# Altium PCB WMCB-V2.PcbDoc
Units mm, origin at the board's own origin, x right, y up, seen from the top; angles counter-clockwise.
Board outline 35 x 45 mm, 2 copper layers (TopLayer, BottomLayer); 31 components, 44 nets, 148 pads, 142 vias.
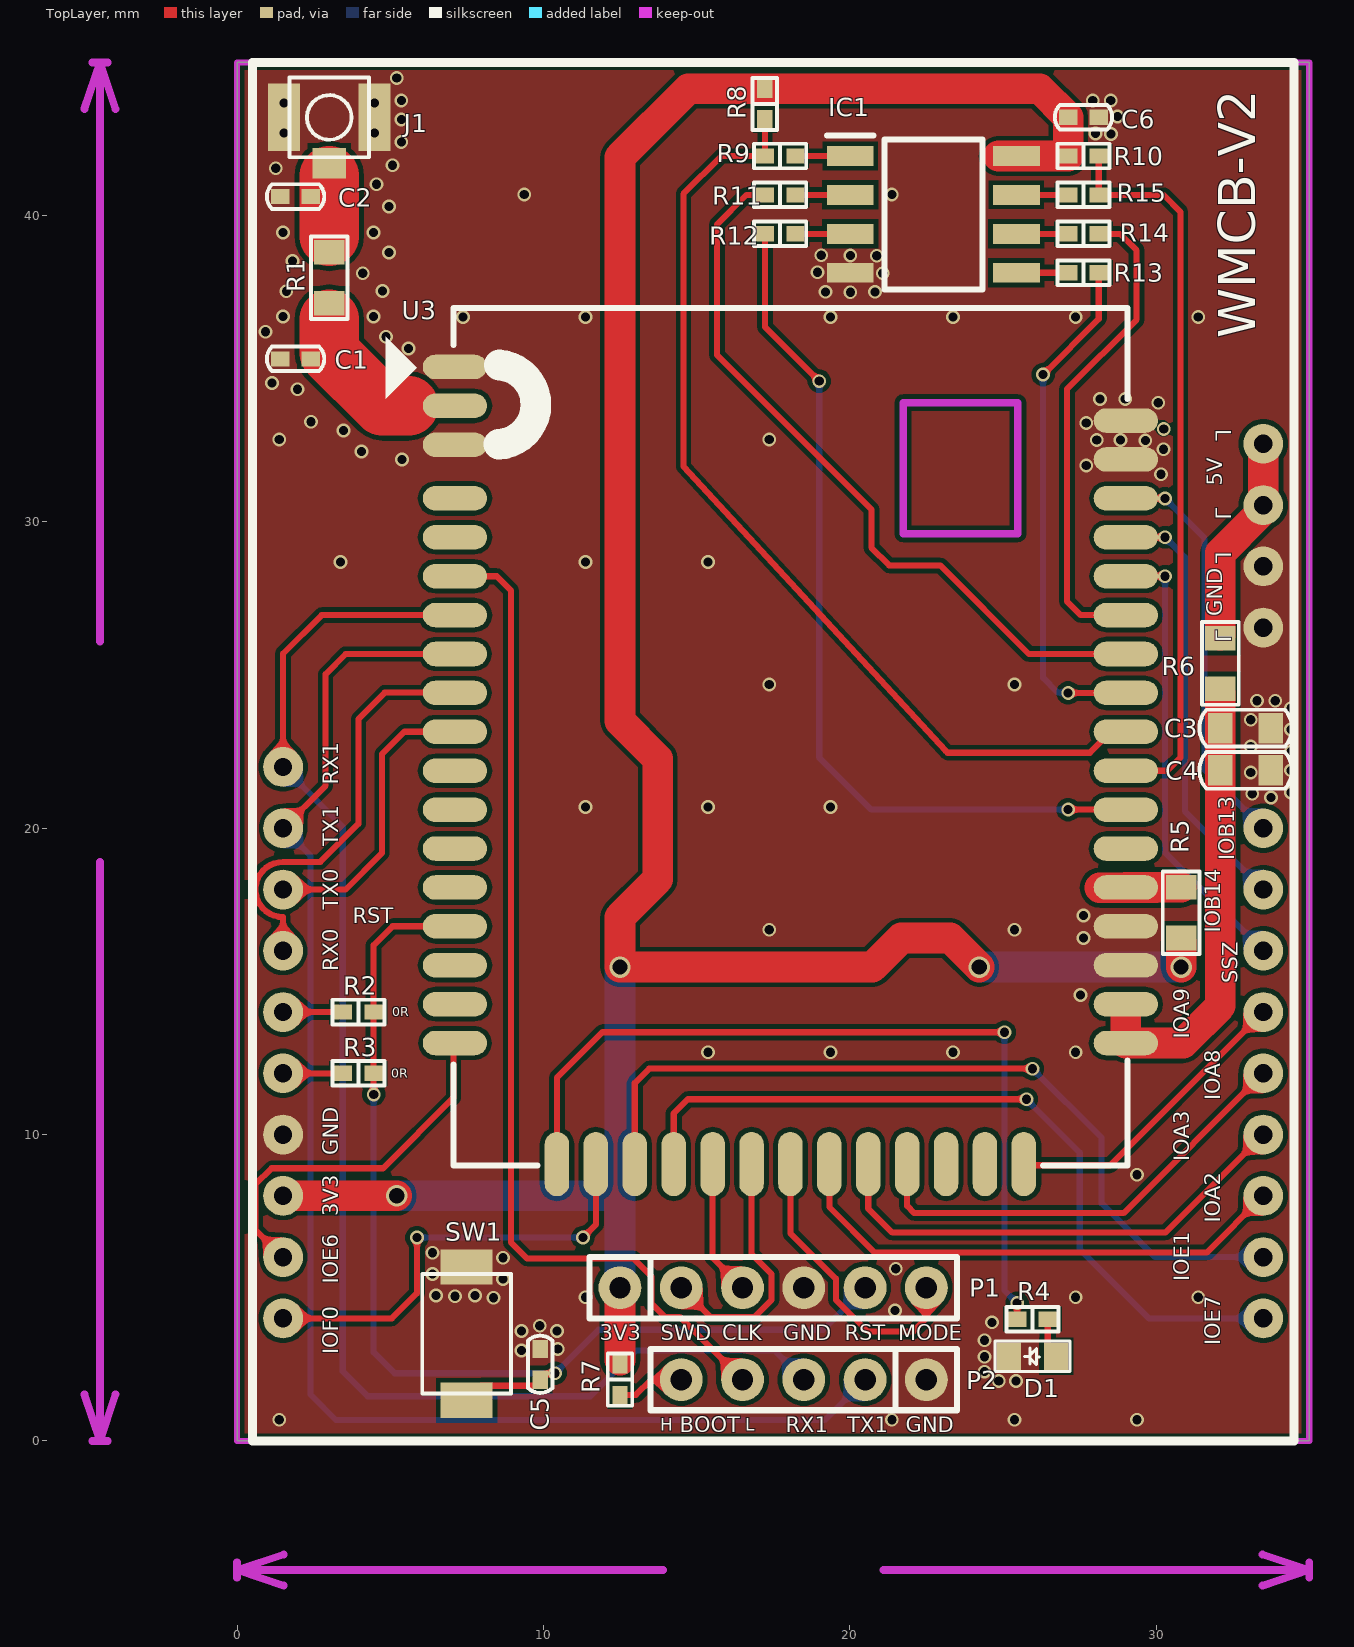
[diagram p0: TopLayer view]
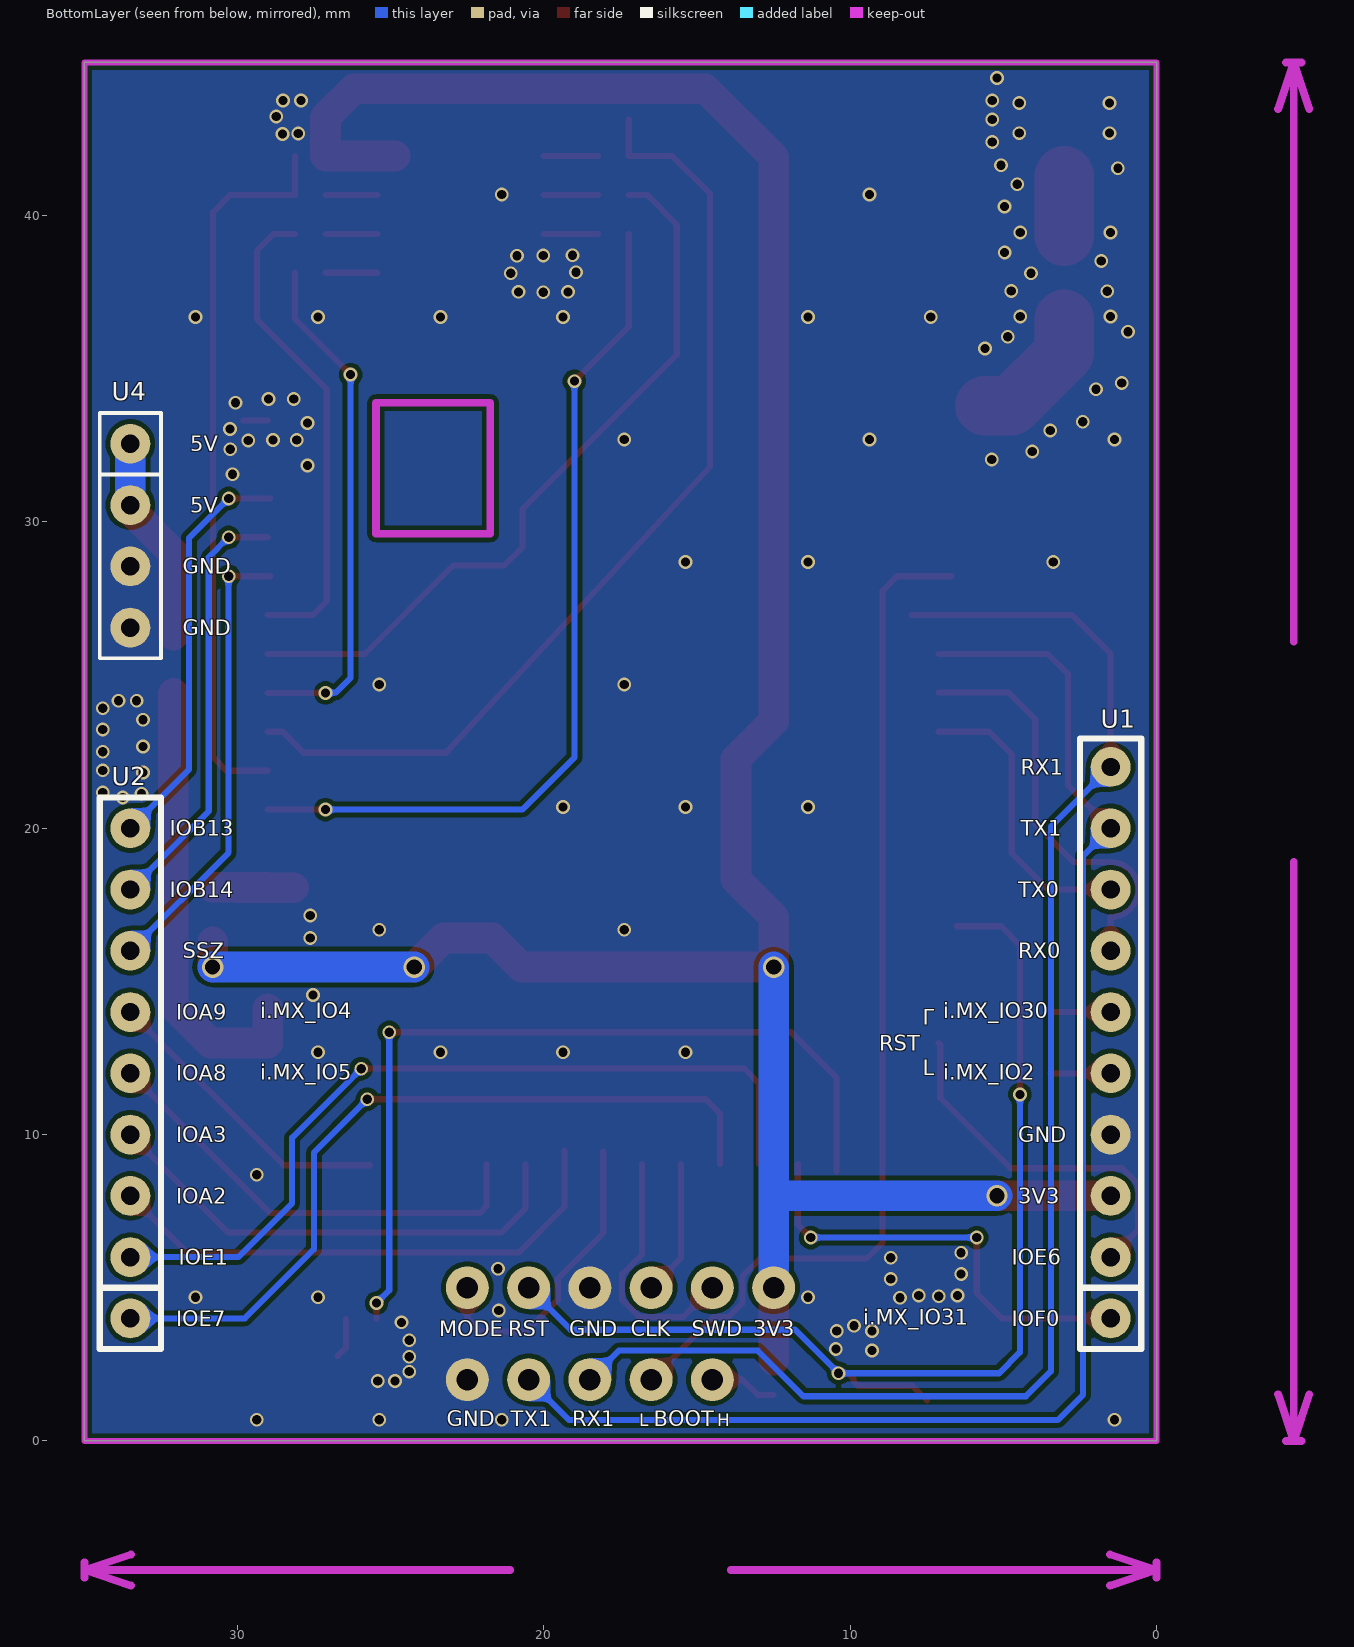
[diagram p1: BottomLayer view, seen from below]
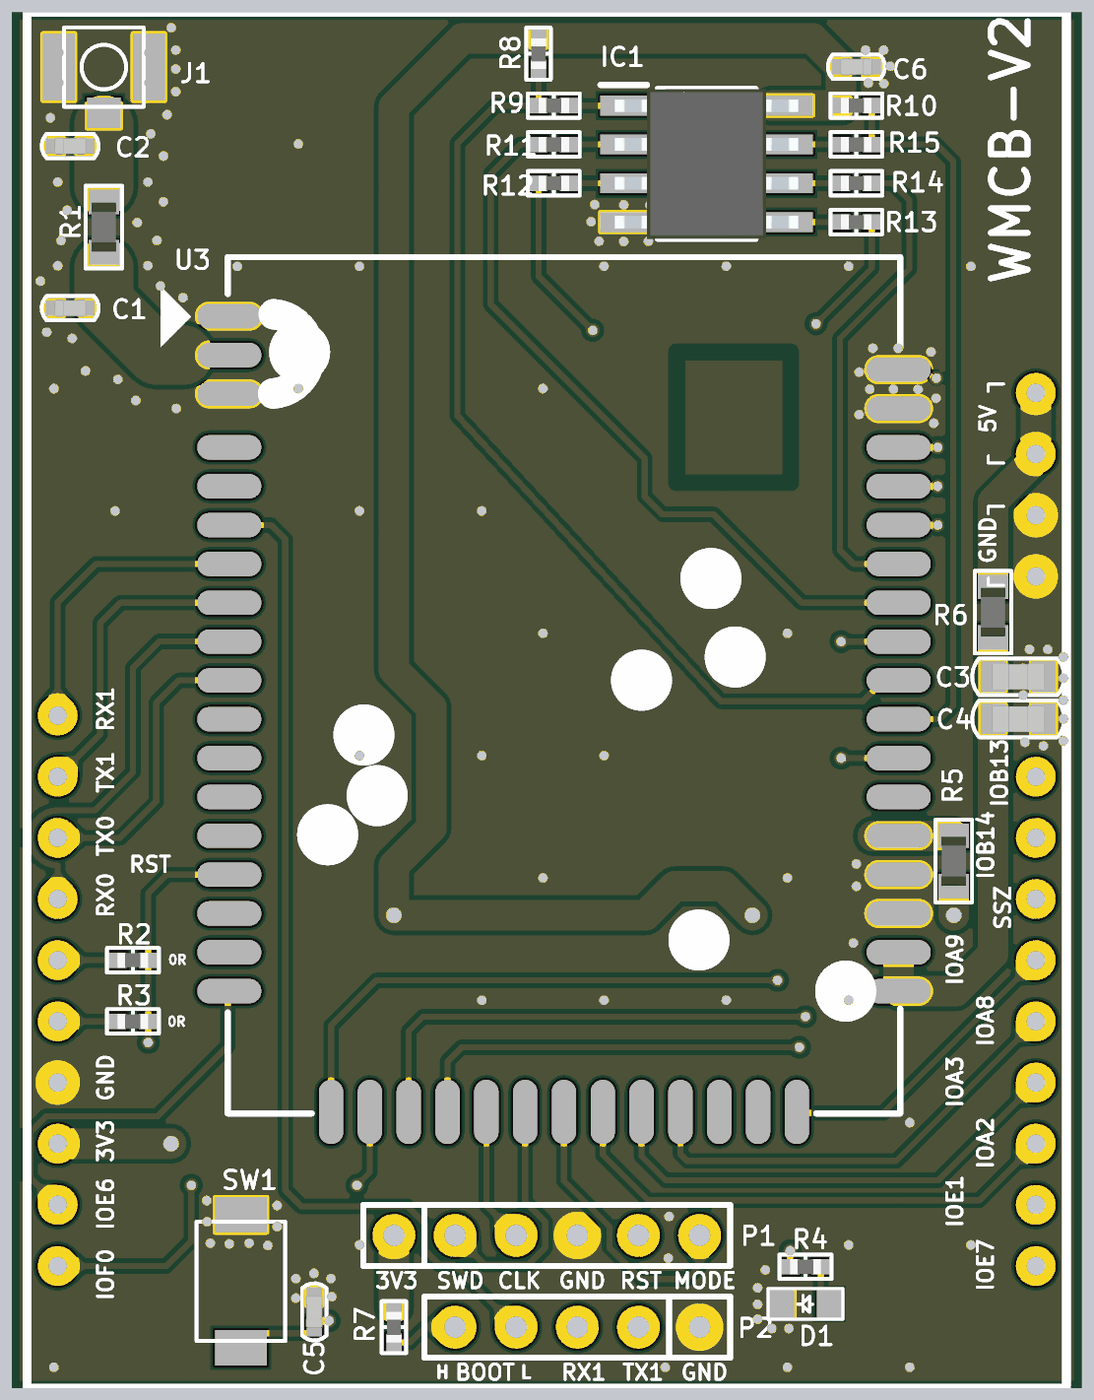
[diagram p2: 3D render of the assembled board from above, using the file's embedded part models]

## Layer stack, top to bottom
TopSolder: solder mask 0.0102, Solder Resist, Dk 3.5
TopLayer: signal copper 0.0711
Dielectric2: prepreg 0.32, FR-4, Dk 4.8
BottomLayer: signal copper 0.0711
BottomSolder: solder mask 0.0102, Solder Resist, Dk 3.5

## Board outline
0,0 0,45 35,45 35,0

## Design rules (kind name [scope] priority, off if disabled: settings)
Clearance [All] p1: gap=0.15 ignorepadtopadclearanceinfootprint=FALSE except(0: Arc-Hole Track-Hole SMDPad-Hole THPad-Hole Via-Hole Fill-Hole Poly-Hole Region-Hole Text-Hole)
ComponentClearance [All] p1 off: gap=0.254 collisioncheckmode=3 verticalgap=0.254 showdistances=FALSE
DiffPairsRouting DiffPairsRouting_9 [All] p1: maxlimit=0.254 minlimit=0.191 mostfreqgap=0.254 toplayer_minwidth=0.381 toplayer_maxwidth=0.381 toplayer_prefwidth=0.381 bottomlayer_minwidth=0.381 bottomlayer_maxwidth=0.381 bottomlayer_prefwidth=0.381 maxuncoupledlength=12.7
DiffPairsRouting DiffPairsRouting_8 [InDifferentialPair('NewDifferentialPair9')] p2: maxlimit=0.203 minlimit=0.203 mostfreqgap=0.203 toplayer_minwidth=0.381 toplayer_maxwidth=0.381 toplayer_prefwidth=0.381 bottomlayer_minwidth=0.381 bottomlayer_maxwidth=0.381 bottomlayer_prefwidth=0.381 maxuncoupledlength=12.7
DiffPairsRouting DiffPairsRouting_7 [InDifferentialPair('NewDifferentialPair8')] p3: maxlimit=0.203 minlimit=0.203 mostfreqgap=0.203 toplayer_minwidth=0.381 toplayer_maxwidth=0.381 toplayer_prefwidth=0.381 bottomlayer_minwidth=0.381 bottomlayer_maxwidth=0.381 bottomlayer_prefwidth=0.381 maxuncoupledlength=12.7
DiffPairsRouting DiffPairsRouting_6 [InDifferentialPair('NewDifferentialPair7')] p4: maxlimit=0.203 minlimit=0.203 mostfreqgap=0.203 toplayer_minwidth=0.381 toplayer_maxwidth=0.381 toplayer_prefwidth=0.381 bottomlayer_minwidth=0.381 bottomlayer_maxwidth=0.381 bottomlayer_prefwidth=0.381 maxuncoupledlength=12.7
DiffPairsRouting DiffPairsRouting_5 [InDifferentialPair('NewDifferentialPair6')] p5: maxlimit=0.203 minlimit=0.203 mostfreqgap=0.203 toplayer_minwidth=0.381 toplayer_maxwidth=0.381 toplayer_prefwidth=0.381 bottomlayer_minwidth=0.381 bottomlayer_maxwidth=0.381 bottomlayer_prefwidth=0.381 maxuncoupledlength=12.7
DiffPairsRouting DiffPairsRouting_4 [InDifferentialPair('NewDifferentialPair5')] p6: maxlimit=0.203 minlimit=0.203 mostfreqgap=0.203 toplayer_minwidth=0.381 toplayer_maxwidth=0.381 toplayer_prefwidth=0.381 bottomlayer_minwidth=0.381 bottomlayer_maxwidth=0.381 bottomlayer_prefwidth=0.381 maxuncoupledlength=12.7
DiffPairsRouting DiffPairsRouting_3 [InDifferentialPair('NewDifferentialPair4')] p7: maxlimit=0.203 minlimit=0.203 mostfreqgap=0.203 toplayer_minwidth=0.381 toplayer_maxwidth=0.381 toplayer_prefwidth=0.381 bottomlayer_minwidth=0.381 bottomlayer_maxwidth=0.381 bottomlayer_prefwidth=0.381 maxuncoupledlength=12.7
DiffPairsRouting DiffPairsRouting_2 [InDifferentialPair('NewDifferentialPair3')] p8: maxlimit=0.203 minlimit=0.203 mostfreqgap=0.203 toplayer_minwidth=0.381 toplayer_maxwidth=0.381 toplayer_prefwidth=0.381 bottomlayer_minwidth=0.381 bottomlayer_maxwidth=0.381 bottomlayer_prefwidth=0.381 maxuncoupledlength=12.7
DiffPairsRouting DiffPairsRouting_1 [InDifferentialPair('NewDifferentialPair2')] p9: maxlimit=0.203 minlimit=0.203 mostfreqgap=0.203 toplayer_minwidth=0.381 toplayer_maxwidth=0.381 toplayer_prefwidth=0.381 bottomlayer_minwidth=0.381 bottomlayer_maxwidth=0.381 bottomlayer_prefwidth=0.381 maxuncoupledlength=12.7
DiffPairsRouting [InDifferentialPair('NewDifferentialPair1')] p10: maxlimit=0.203 minlimit=0.203 mostfreqgap=0.203 toplayer_minwidth=0.381 toplayer_maxwidth=0.381 toplayer_prefwidth=0.381 bottomlayer_minwidth=0.381 bottomlayer_maxwidth=0.381 bottomlayer_prefwidth=0.381 maxuncoupledlength=12.7
FabricationTestPointUsage TestPointUsage [All] p1: valid=0 allowmultiple=FALSE
FabricationTestpoint Testpoint [(IsPad And (OnTopLayer Or OnBottomLayer))] p1: side=3 testpointundercomponent=TRUE minsize=1.016 maxsize=2.54 preferedsize=1.524 minholesize=0.508 maxholesize=1.016 preferedholesize=0.813 testpointgrid=0.025 allowsidetop=TRUE allowsidebottom=TRUE usegrid=TRUE gridtolerance=0
HoleSize [All] p1: absolutevalues=TRUE maxlimit=5 minlimit=0.025 maxpercent=80.000 minpercent=20.000
HoleToHoleClearance [All] p1 off: gap=0.254 allowstackedmicrovias=TRUE
MinimumSolderMaskSliver [All] p1 off: minsoldermaskwidth=0.254
PolygonConnect [All] p1: connectstyle=Direct reliefconductorwidth=0.6 reliefentries=4 polygonreliefangle="90 Angle" airgapwidth=0.254
RoutingVias [All] p1: holewidth=0.3 width=0.5 viastyle="Through Hole" minholewidth=0.3 minwidth=0.453 maxholewidth=5 maxwidth=5
SilkToSilkClearance [All] p1 off: silktosilkclearance=0.254
SilkToSolderMaskClearance SilkscreenOverComponentPads [IsPad] p1 off: minsilkscreentomaskgap=0.254 clearancetoexposedcopper=TRUE
SolderMaskExpansion [All] p1: expansion=0.077 istentingtop=FALSE
Width [All] p1: maxlimit=5 minlimit=0.15 preferedwidth=0.203
21 further rules are at their usual default settings.

## Components (designator, comment, footprint, x,y, rotation, side; value= is the part's Value field where it differs from the comment)
C1 "0.1uF/NC" 0402C 1.91,35.321 r0 top
C2 "0.1uF/NC" 0402C 1.91,40.621 r0 top
C3 "0.1uF" 0603C 32.925,23.269 r180 top
C4 "0.1uF" 0603C 32.925,21.89 r0 top value=1uF
C5 "0.1uF" 0402C 9.895,2.5 r90 top
C6 "1uF" 0402C 27.63,43.214 r180 top
D1 "Green_LED" LED0603--0.4mm 25.965,2.762 r180 top
IC1 "IS62WVS2568FBLL-20NLI" SOIC127P600X175-8N 22.73,40.039 r0 top
J1 "I-PEX-CON" I-PEX-CON 3.01,41.703 r270 top
P1 "6PIN-200" 6PIN-200 12.5,5 r0 top
P2 "5Pin-200" 5pin-200 22.5,2 r180 top
R1 "0R" 0603 3.01,37.971 r90 top
R2 "0R" 0402 3.96,14 r0 top
R3 "0R" 0402 3.96,12 r0 top
R4 "220R" 0402 25.965,3.977 r180 top
R5 "0R" 0603 30.816,17.243 r90 top
R6 "0R" 0603 32.1,25.38 r270 top
R7 "1K" 0402 12.5,2 r270 top
R8 "NC" 0402 17.23,43.641 r270 top
R9 "10k" 0402 17.73,41.944 r0 top
R10 "10k" 0402 27.63,41.944 r180 top
R11 "22R" 0402 17.73,40.674 r180 top
R12 "22R" 0402 17.73,39.404 r0 top
R13 "22R" 0402 27.63,38.134 r180 top
R14 "22R" 0402 27.63,39.404 r180 top
R15 "22R" 0402 27.63,40.674 r180 top
SW1 "Push  Button" Button_2pin-3*4*2MM 7.495,3.5 r270 top value=Switch-SMD-6x6mm
U1 "10PIN-200" 10PIN-200 1.5,4 r90 bottom
U2 "9PIN-200" 9PIN-200 33.5,4 r90 bottom
U3 "WS7300-915" WiSun-Lierda 18.064,23.914 r0 top
U4 "4PIN-200" 4PIN-200 33.5,32.55 r270 bottom value=MicroUSB

## Footprints (in the part's own frame and the unit in brackets; to place one, negate y for a bottom-side part, rotate by r counter-clockwise, add the part's x,y. Pads: shape width x height; smd on the part's side, far side on the other; paste and mask are expansions set on the pad)
4PIN-200 [mm]
  round 1.3 hole 0.6: 1(0,0) 2(2,0) 3(4,0) 4(6,0)
  silkscreen extent -1,-1 7,1
5pin-200 [mm]
  round 1.4 hole 0.7: 1(0,0) 2(2,0) 3(4,0) 4(6,0) 5(8,0)
  silkscreen extent -1,-1 9,1
6PIN-200 [mm]
  round 1.4 hole 0.7: 1(0,0) 2(2,0) 3(4,0) 4(6,0) 5(8,0) 6(10,0)
  silkscreen extent -1,-1 11,1
9PIN-200 [mm]
  round 1.3 hole 0.6: 1(0,0) 2(2,0) 3(4,0) 4(6,0) 5(8,0) 6(10,0) 7(12,0) 8(14,0) 9(16,0)
  silkscreen extent -1,-1 17,1
10PIN-200 [mm]
  round 1.3 hole 0.6: 1(0,0) 2(2,0) 3(4,0) 4(6,0) 5(8,0) 6(10,0) 7(12,0) 8(14,0) 9(16,0) 10(18,0)
  silkscreen extent -1,-1 18.92,1
0402 [mm]
  rect 0.6x0.5 smd: 1(-0.5,0) 2(0.5,0)
  silkscreen extent -0.85,-0.4 0.85,0.4, body extent -0.5,-0.25 0.5,0.25, height 0.25
0402C [mm]
  rect 0.6x0.5 smd: 1(-0.5,0) 2(0.5,0)
  silkscreen extent -0.94,-0.4 0.94,0.4, body extent -0.53,-0.27 0.52,0.28, height 0.58
0603 [mm]
  rect 0.8x1 smd: 1(-0.826,0) 2(0.826,0)
  silkscreen extent -1.35,-0.6 1.35,0.6, body extent -0.8,-0.4 0.8,0.4, height 0.45
0603C [mm]
  rect 0.8x1 smd: 1(-0.826,0) 2(0.826,0)
  silkscreen extent -1.51,-0.6 1.51,0.6, body extent -0.85,-0.44 0.85,0.44, height 0.9
Button_2pin-3*4*2MM [mm] "Button_2pin-3*4*2MM"
  rect 1.15x1.7 smd: 1(2.175,0) 2(-2.175,0)
  silkscreen extent -1.95,-1.45 1.95,1.45
I-PEX-CON [mm]
  rect 1x1.1 smd: 1(0,0)
  rect 2.2x1.05 smd: 2(-1.5,1.475) 2(-1.5,-1.475)
  silkscreen extent -2.8,-1.3 -0.2,1.3
LED0603--0.4mm [mm] "LED0603--0.4mm"
  rect 0.8x0.9 smd: 1(-0.775,0) 2(0.775,0)
  silkscreen extent -1.23,-0.5 1.23,0.5
SOIC127P600X175-8N [mm]
  rect 1.525x0.65 smd: 1(-2.712,1.905) 2(-2.712,0.635) 3(-2.712,-0.635) 4(-2.712,-1.905) 5(2.712,-1.905) 6(2.712,-0.635) 7(2.712,0.635) 8(2.712,1.905)
  silkscreen extent -3.47,-2.45 1.6,2.58, body extent -3,-2.45 3,2.45, height 1.75
WiSun-Lierda [mm]
  oval 2.1x0.8 smd: 1(-10.95,11.144) 2(-10.95,9.874) 3(-10.95,8.604) 4(-10.95,6.854) 5(-10.95,5.584) 6(-10.95,4.314) 7(-10.95,3.044) 8(-10.95,1.774) 9(-10.95,0.504) 10(-10.95,-0.766) 11(-10.95,-2.036) 12(-10.95,-3.306) 13(-10.95,-4.576) 14(-10.95,-5.846) 15(-10.95,-7.116) 16(-10.95,-8.386) 17(-10.95,-9.656) 18(-10.95,-10.926) 32(10.95,-10.926) 33(10.95,-9.656) 34(10.95,-8.386) 35(10.95,-7.116) 36(10.95,-5.846) 37(10.95,-4.576) 38(10.95,-3.306) 39(10.95,-2.036) 40(10.95,-0.766) 41(10.95,0.504) 42(10.95,1.774) 43(10.95,3.044) 44(10.95,4.314) 45(10.95,5.584) 46(10.95,6.854) 47(10.95,8.124) 48(10.95,9.394)
  round 2 on Top Overlay paste-10: 1(-8.65,9.974) 1(-7.732,-5.812) 1(-6.546,-2.55) 1(-6.112,-4.534) 1(2.536,-0.759) 1(4.416,-9.254) 1(4.807,2.566) 1(5.602,0) 1(9.216,-10.926)
  oval 0.8x2.1 smd: 19(-7.62,-14.876) 20(-6.35,-14.876) 21(-5.08,-14.876) 22(-3.81,-14.876) 23(-2.54,-14.876) 24(-1.27,-14.876) 25(0,-14.876) 26(1.27,-14.876) 27(2.54,-14.876) 28(3.81,-14.876) 29(5.08,-14.876) 30(6.35,-14.876) 31(7.62,-14.876)
  KeepOutLayer lines w0.25: 3.683,5.697 7.417,5.697 7.417,9.974 3.683,9.974 3.683,5.697
  silkscreen extent -13.2,-14.93 11,13.07, body extent -11,-14.93 11,13.07, height 3

## Part data
C1 C2 C6: library part CAP, "Capacitor"
C3 C4 C5: library part "Cap Semi", "Capacitor (Semiconductor SIM Model)", LatestRevisionDate=17-Jul-2002, LatestRevisionNote="Re-released for DXP Platform.", PackageReference=C1206, Published=8-Jun-2000, Publisher="Altium Limited"
D1: library part LED, Manufacturer=Citizen, Manufacturer's Part Number=CL-170G-CD-T, Old Part Number=4317000, Package Height=1.1mm, Part Number=41100017000, VALUE_ALLEGRO=Red_LED, Bottom=20, Cost=0.48, FPLIST=mot/0805LED,dig/0805led, PCB_dir=90.000000, PCB_x=46.095000, PCB_y=6.420000, Right=40
IC1: "Integrated Circuit", Manufacturer_Name="Integrated Silicon Solution Inc.", Mouser2 Part Number=870-WVS2568FBLL20NLI, Datasheet Link=https://componentsearchengine.com//IS62WVS2568FBLL-20NLI.pdf, Height=1.75mm, Manufacturer_Part_Number=IS62WVS2568FBLL-20NLI, Mouser2 Price/Stock=https://www.mouser.com/Search/Refine.aspx?Keyword=870-WVS2568FBLL20NLI
J1: library part CON2, "Connector"
P1: "Pin Header", LatestRevisionDate=17-Jul-2002, LatestRevisionNote="Re-released for DXP Platform.", Publisher="Altium Limited"
P2: library part PIN5
R1 R2 R3 R4 R5 R6 R7 R8 R9 R10 R11 R12 R13 R14 R15: library part "Res Semi", "Semiconductor Resistor", LatestRevisionDate=17-Jul-2002, LatestRevisionNote="Re-released for DXP Platform.", PackageReference=AXIAL-0.5, Published=8-Jun-2000, Publisher="Altium Limited"
SW1: library part SW1, "Push Button"
U4: library part CON4, "Connector"

## Via types
v1: diameter 0.45, hole 0.3, TopLayer to BottomLayer, tented both sides, 138 vias
v2: diameter 0.7, hole 0.5, TopLayer to BottomLayer, tented both sides, 4 vias

## Nets (pads, with @x,y where several pads share a name; then routed paths per layer and width w, separated by ;. In a path a pad name is that pad's centre, name@x,y a point inside that pad or via, vN(x,y) a via of type N, cw(c..) or ccw(c..) an arc to the next point about the centre after c; other vN are vias at no path point)
3V3: C6.2 IC1.8 P1.1 R5.1 R7.1 R8.1 R10.2 U1.3 | length 90.7
  TopLayer w1: U1.3 v2(5.21,8) ; R7.1@12.5,2.63 P1.1 ; v2(24.229,15.469) 23.28,16.417 21.687,16.417 20.738,15.469 v2(12.5,15.469) 12.5,17.1 13.73,18.33 13.73,22.27 12.5,23.5 12.5,41.909 14.732,44.141 R8.1 26.203,44.141 C6.2 R10.2 IC1.8 IC1.8@24.856,41.944 ; v2(30.816,15.469) R5.1@30.816,16.3
  BottomLayer w1: v2(5.21,8) 12.5,8 ; P1.1 12.5,8 ; v2(12.5,15.469) 12.5,8 ; v2(24.229,15.469) v2(30.816,15.469)
3V3_OUT: R5.2 U3.36 | length 3.6
  TopLayer w1: U3.36@28.167,18.061 U3.36@29.99,18.061 ; U3.36 R5.2
+5V: R6.1 U4.1 U4.2 | length 8.6
  TopLayer w1: R6.1@32.1,26.3 32.1,28.988 33.35,30.238 33.35,30.319 33.443,30.411 U4.2@33.443,30.55 ; U4.2 33.5,31.48 ; 33.5,31.62 U4.1
  BottomLayer w1: U4.1@33.46,32.55 U4.1 33.5,31.58 ; U4.2 33.5,31.48
CLK: R14.1 U3.43 | length 16
  TopLayer w0.2: R14.1 28.822,39.404 29.363,38.863 29.363,36.603 27.09,34.33 27.09,27.41 27.542,26.958 U3.43
GND: C1.1 C2.1 C3.1 C4.2 C5.2 C6.1 D1.2 IC1.4 J1.2 P1.4 P2.1 SW1.2 U1.4 U3.1@7.114,35.058 U3.3 U3.34 U3.35 U3.47 U3.48 U4.3 U4.4 | length 1
  TopLayer w0.203: U3.48 U3.48@29.825,33.308 ; v1@30.203,33.077 v1(30.25,33.03)
  BottomLayer w0.2: U1.4@1.5,9.87 U1.4
  other v1: 1.375,0.69 21.375,0.69 25.375,0.69 29.375,0.69 24.862,1.955 25.425,1.955 24.398,2.262 24.398,2.747 9.29,2.95 10.47,3 24.398,3.285 9.29,3.59 10.44,3.59 9.88,3.76 24.648,3.871 21.477,4.255 8.374,4.672 11.375,4.69 27.375,4.69 31.375,4.69 7.114,4.724 6.495,4.745 7.764,4.745 8.68,5.29 6.38,5.45 21.5,5.621 8.68,5.98 6.38,6.14 29.375,8.69 15.375,12.69 19.375,12.69 23.375,12.69 27.375,12.69 27.534,14.56 27.63,16.417 17.375,16.69 25.375,16.69 27.63,17.15 11.375,20.69 15.375,20.69 19.375,20.69 33.751,21.005 33.141,21.126 34.4,21.169 33.091,21.822 34.4,21.89 34.4,22.5 33.091,22.669 34.4,23.22 33.091,23.545 34.4,23.914 33.295,24.164 33.891,24.164 17.375,24.69 25.375,24.69 3.375,28.69 11.375,28.69 15.375,28.69 30.163,31.557 27.72,31.84 5.38,32.038 4.059,32.3 30.238,32.373 28.066,32.67 28.84,32.67 29.65,32.66 1.375,32.69 9.375,32.69 17.375,32.69 3.47,32.988 27.72,33.23 2.41,33.27 30.07,33.89 28.167,34.008 28.995,34.008 1.977,34.33 1.14,34.533 5.597,35.662 4.859,36.046 0.931,36.206 7.375,36.69 11.375,36.69 19.375,36.69 23.375,36.69 27.375,36.69 31.375,36.69 1.5,36.709 4.452,36.709 20.02,37.5 19.21,37.51 20.826,37.51 1.609,37.531 4.745,37.536 4.103,38.12 21.08,38.12 18.95,38.15 1.809,38.52 20.879,38.692 19.071,38.707 20.02,38.7 4.96,38.797 1.5,39.446 4.452,39.446 4.963,40.295 9.375,40.69 21.375,40.69 4.547,41.021 1.265,41.544 5.077,41.646 5.363,42.398 28.53,42.66 28.02,42.68 1.535,42.691 4.485,42.691 5.363,43.14 28.74,43.23 1.535,43.677 4.485,43.677 5.363,43.76 27.93,43.76 28.52,43.76 5.214,44.491
HOLD: R10.1 R15.1 U3.39 | length 23.9
  TopLayer w0.2: R10.1 R15.1 30.242,40.674 30.8,40.116 30.8,22.315 30.364,21.878 U3.39
I.MX_IO2: R3.1 U1.5 | length 2
  TopLayer w0.2: U1.5 R3.1
I.MX_IO4: U2.6 U3.31 | length 9.9
  TopLayer w0.2: U3.31@25.684,9 28.5,9 U2.6
i.MX_IO5: U2.5 U3.28 | length 15
  TopLayer w0.2: U3.28 21.87,9.035 21.87,7.67 22.1,7.44 28.94,7.44 U2.5
i.MX_IO30: R2.1 U1.6 | length 2
  TopLayer w0.2: U1.6 R2.1
i.MX_IO31: U1.1 U3.20 | length 14.5
  TopLayer w0.2: U1.1 5.05,4 5.872,4.822 v1(5.872,6.64) ; v1(11.29,6.64) 11.714,7.064 U3.20
  BottomLayer w0.2: v1(5.872,6.64) v1@11.25,6.64
IOA2: U2.3 U3.26 | length 17.4
  TopLayer w0.2: U3.26@19.334,9.474 19.334,7.636 20.82,6.15 31.65,6.15 U2.3
IOA3: U2.4 U3.27 | length 16
  TopLayer w0.2: U3.27 20.604,7.586 21.39,6.8 30.3,6.8 U2.4
IOB13: U2.9 U3.46 | length 13.5
  TopLayer w0.2: U3.46@28.93,30.768 v1@30.295,30.768
  BottomLayer w0.2: v1(30.29,30.768) 31.58,29.478 31.58,21.92 U2.9
IOB14: U2.8 U3.45 | length 14.1
  TopLayer w0.2: U3.45 v1(30.29,29.498)
  BottomLayer w0.2: v1@30.284,29.492 30.296,29.492 30.94,28.848 30.94,20.56 U2.8
IOE1: U2.2 U3.21 | length 27.2
  TopLayer w0.2: U3.21 12.984,11.684 13.452,12.152 v1(25.965,12.152)
  BottomLayer w0.2: v1(25.965,12.152) 28.22,9.897 28.22,7.76 29.98,6 U2.2
IOE6: U1.2 U3.18 | length 12.2
  TopLayer w0.2: U1.2 0.6,6.9 0.6,8.373 1.127,8.9 4.768,8.9 7.064,11.196 7.064,12.938 U3.18
IOE7: U2.1 U3.22 | length 25.9
  TopLayer w0.2: U3.22 14.254,10.693 14.715,11.155 v1(25.766,11.155)
  BottomLayer w0.2: v1(25.766,11.155) 27.509,9.412 27.509,6.255 29.764,4 U2.1
MISO: R11.2 U3.42 | length 24.3
  TopLayer w0.2: R11.2 16.63,40.674 15.663,39.707 15.663,35.452 20.705,30.41 20.705,29.163 21.288,28.58 22.955,28.58 25.847,25.688 U3.42
MOSI: R13.1 U3.41 | length 16.9
  TopLayer w0.2: v1(26.31,34.808) 28.13,36.628 R13.1 ; v1(27.13,24.418) U3.41
  BottomLayer w0.2: v1@26.413,34.808 26.31,34.705 26.31,24.911 26.795,24.426 27.122,24.426 v1(27.13,24.418)
NetC1_2: C1.2 R1.1 U3.2 | length 4.4
  TopLayer w1.944: 3.01,36.621 3.01,35.524 4.745,33.788 5.608,33.788
NetC2_2: C2.2 J1.1 R1.2 | length 2
  TopLayer w1.944: 3.01,39.321 J1.1@3.01,41.304
NetC3_2: C3.2 C4.1 R6.2 U3.32 U3.33 | length 14.9
  TopLayer w1: U3.33@29.014,14.1 U3.32 30.888,12.988 32.1,14.2 C4.1 C3.2 R6.2@32.1,24.4
NetD1_1: D1.1 R4.1 | length 1.3
  TopLayer w0.2: R4.1 26.465,3.037 D1.1
NetIC1_1: IC1.1 R9.2 | length 1.8
  TopLayer w0.2: R9.2 IC1.1
NetIC1_2: IC1.2 R11.1 | length 1.8
  TopLayer w0.2: R11.1 IC1.2
NetIC1_3: IC1.3 R12.2 | length 1.8
  TopLayer w0.2: R12.2 IC1.3
NetIC1_5: IC1.5 R13.2 | length 1.7
  TopLayer w0.2: IC1.5 R13.2
NetIC1_6: IC1.6 R14.2 | length 1.7
  TopLayer w0.2: IC1.6 R14.2
NetIC1_7: IC1.7 R15.2 | length 1.7
  TopLayer w0.2: IC1.7 R15.2
NetP2_5: P2.5 R7.2 | length 2.2
  TopLayer w0.2: R7.2 13.02,1.5 13.52,2 P2.5
SRAM_CS: R8.2 R9.1 U3.40 | length 32.1
  TopLayer w0.2: R8.2 R9.1 15.811,41.944 14.573,40.706 14.573,31.806 23.135,22.526 23.137,22.523 23.196,22.465 27.842,22.465 28.526,23.148 U3.40
SSZ: U2.7 U3.44 | length 14.9
  TopLayer w0.2: U3.44@28.925,28.228 U3.44 v1(30.29,28.228)
  BottomLayer w0.2: v1@30.295,28.228 30.295,19.205 U2.7
Wis-BOOT: P2.4 U3.6 | length 33.7
  TopLayer w0.2: U3.6@6.693,28.228 8.476,28.228 8.945,27.76 8.945,6.475 9.47,5.95 12.943,5.95 13.52,5.372 13.52,4.5 13.969,4.051 14.449,4.051 14.5,4 P2.4
Wis-LED1: R4.2 U3.19 | length 27.8
  TopLayer w0.2: U3.19@10.444,8.799 10.444,11.859 11.925,13.34 v1(25.05,13.34) ; R4.2 v1(25.465,4.5)
  BottomLayer w0.2: v1(25.05,13.34) 25.05,4.915 v1(25.465,4.5)
Wis-MODE: P1.6 U3.25 | length 10
  TopLayer w0.2: U3.25@18.064,9.443 U3.25 18.064,6.78 19.55,5.293 19.55,5.178 19.55,4.892 19.55,4.606 20.58,3.577 22.077,3.577 22.5,4 P1.6
Wis-RESET: C5.1 P1.5 R2.2 R3.2 SW1.1 U3.15 | length 36.4
  TopLayer w0.2: v1(4.46,11.31) R3.2 R2.2 4.46,16.183 5.077,16.8 U3.15@6.521,16.8 ; SW1.1 7.97,1.8 9.628,1.8 9.745,1.8 9.895,1.95 C5.1 9.895,2.05 10.045,2.2 10.37,2.2 v1(10.38,2.21)
  BottomLayer w0.2: v1(4.46,11.31) 4.46,2.89 5.14,2.21 v1(10.38,2.21) 11.8,3.63 19.13,3.63 P1.5
Wis-RX0: U1.7 U3.9 | length 13.8
  TopLayer w0.2: U1.7 1.5,17.1 cw(c1.5,18) 1.5,18.9 2.714,18.9 3.96,20.146 3.96,23.564 4.822,24.426 U3.9@7.114,24.426
Wis-RX1: P2.3 U1.10 U3.7 | length 47.7
  TopLayer w0.2: U1.10 1.5,25.7 2.758,26.958 U3.7@7.999,26.958
  BottomLayer w0.2: U1.10 3.449,20.051 3.449,2.275 4.264,1.46 11.53,1.46 13.02,2.95 17.55,2.95 P2.3
Wis-SWCLK: P1.3 U3.23 | length 4.4
  TopLayer w0.2: U3.23 15.524,5.976 P1.3
Wis-SWD: P1.2 U3.24 | length 8.3
  TopLayer w0.2: P1.2 15.45,4.05 16.893,4.05 17.45,4.606 17.45,5.44 16.794,6.097 U3.24
Wis-TX0: U1.8 U3.10 | length 9.6
  TopLayer w0.2: U1.8 3.54,18 4.727,19.188 4.727,22.415 5.461,23.148 U3.10
Wis-TX1: P2.2 U1.9 U3.8 | length 48
  TopLayer w0.2: U1.9 2.89,21.39 2.89,25.029 3.55,25.688 U3.8
  BottomLayer w0.2: U1.9 2.4,19.1 2.4,1.51 3.23,0.68 19.18,0.68 P2.2
WP: R12.1 U3.38 | length 28.6
  TopLayer w0.2: R12.1 17.23,36.37 v1(19.005,34.595) ; v1@27.13,20.56 27.198,20.56 27.246,20.608 U3.38
  BottomLayer w0.2: v1(19.005,34.595) 19.005,22.308 20.705,20.608 v1(27.13,20.608)
pads on no net: U3.1@9.414,33.888 U3.1@10.332,18.102 U3.1@11.518,21.364 U3.1@11.952,19.38 U3.1@20.6,23.155 U3.1@22.48,14.66 U3.1@22.871,26.48 U3.1@23.666,23.914 U3.1@27.279,12.988 U3.4 U3.5 U3.11 U3.12 U3.13 U3.14 U3.16 U3.17 U3.29 U3.30 U3.37

## Polygon pours and split planes (outlines as drawn)
GND on BottomLayer "GND_L02_P002" (solid, pour order 2): 0,45 0,0 35,0 35,45
GND on TopLayer "GND_L01_P000" (solid, pour order 0): 0,45 0,0 35,0 35,45

## Keep-outs
KeepOutLayer:
  lines w0.2: 0,0 0,45 35,45 35,0 0,0
  lines w0.254: -4.983,1.524 -4.475,0 ; -4.983,43.476 -4.475,45 ; -4.729,0 -4.221,0 ; -4.729,45 -4.221,45 ; -4.475,18.901 -4.475,0 ; -4.475,26.099 -4.475,45 ; -3.967,1.524 -4.475,0 ; -3.967,43.476 -4.475,45 ; 0,-4.468 0,-3.96 ; 1.524,-4.722 0,-4.214 ; 1.524,-3.706 0,-4.214 ; 13.901,-4.214 0,-4.214 ; 21.099,-4.214 35,-4.214 ; 33.476,-4.722 35,-4.214 ; 33.476,-3.706 35,-4.214 ; 35,-4.468 35,-3.96
  text "45mm" at -3.561,19.155 h1.52 r90
  text "35mm" at 14.155,-5.129 h1.52

## Silkscreen, mask and mechanical layers (free items; w line width, h text height)
TopOverlay:
  lines w0.293: 0.5,0 34.5,0 34.5,45 0.5,45 0.5,0
  text "WMCB-V2" at 33.241,35.993 h1.2 r90
  text "L" at 31.94,33.027 h0.5 r270
  text "5V" at 32.167,31.181 h0.5 r90
  text "L" at 31.94,30.073 h0.5 r270
  text "L" at 31.94,29.027 h0.5 r270
  text "GND" at 32.167,26.913 h0.5 r90
  text "L" at 31.94,26.073 h0.5 r270
  text "RX1" at 3.305,21.417 h0.5 r90
  text "TX1" at 3.305,19.417 h0.5 r90
  text "IOB13" at 32.549,18.951 h0.5 r90
  text "TX0" at 3.305,17.334 h0.5 r90
  text "RST" at 3.778,16.9 h0.5
  text "IOB14" at 32.1,16.591 h0.5 r90
  text "RX0" at 3.305,15.334 h0.5 r90
  text "SSZ" at 32.659,14.936 h0.5 r90
  text "0R" at 5.06,13.87 h0.3
  text "IOA9" at 31.088,13.125 h0.5 r90
  text "0R" at 5.03,11.85 h0.3
  text "IOA8" at 32.088,11.125 h0.5 r90
  text "GND" at 3.305,9.334 h0.5 r90
  text "IOA3" at 31.088,9.125 h0.5 r90
  text "3V3" at 3.305,7.334 h0.5 r90
  text "IOA2" at 32.088,7.125 h0.5 r90
  text "IOE1" at 31.088,5.209 h0.5 r90
  text "IOE6" at 3.305,5.125 h0.5 r90
  text "3V3" at 11.834,3.285 h0.5
  text "SWD" at 13.834,3.285 h0.5
  text "CLK" at 15.834,3.285 h0.5
  text "GND" at 17.834,3.285 h0.5
  text "RST" at 19.834,3.285 h0.5
  text "MODE" at 21.584,3.285 h0.5
  text "IOE7" at 32.088,3.125 h0.5 r90
  text "IOF0" at 3.305,2.825 h0.5 r90
  text "H" at 13.81,0.34 h0.4
  text "L" at 16.59,0.34 h0.4
  text "BOOT" at 14.449,0.288 h0.5
  text "RX1" at 17.917,0.288 h0.5
  text "TX1" at 19.917,0.288 h0.5
  text "GND" at 21.834,0.288 h0.5
BottomOverlay:
  text "5V" at 31.542,32.3 h0.5
  text "5V" at 31.542,30.3 h0.5
  text "GND" at 31.792,28.3 h0.5
  text "GND" at 31.792,26.3 h0.5
  text "RX1" at 4.43,21.75 h0.5
  text "TX1" at 4.43,19.75 h0.5
  text "IOB13" at 32.208,19.75 h0.5
  text "TX0" at 4.513,17.75 h0.5
  text "IOB14" at 32.208,17.75 h0.5
  text "RX0" at 4.513,15.75 h0.5
  text "SSZ" at 31.792,15.75 h0.5
  text "L" at 7.64,14.095 h0.5 r180
  text "i.MX_IO30" at 6.96,13.792 h0.5
  text "i.MX_IO4" at 29.263,13.792 h0.5
  text "IOA9" at 32,13.75 h0.5
  text "RST" at 9.05,12.73 h0.5
  text "L" at 7.64,11.93 h0.5
  text "i.MX_IO2" at 6.96,11.792 h0.5
  text "i.MX_IO5" at 29.263,11.792 h0.5
  text "IOA8" at 32,11.75 h0.5
  text "GND" at 4.513,9.75 h0.5
  text "IOA3" at 32,9.75 h0.5
  text "3V3" at 4.513,7.75 h0.5
  text "IOA2" at 32,7.75 h0.5
  text "IOE6" at 4.722,5.75 h0.5
  text "IOE1" at 31.917,5.75 h0.5
  text "i.MX_IO31" at 9.57,3.792 h0.5
  text "IOF0" at 4.722,3.75 h0.5
  text "IOE7" at 32,3.75 h0.5
  text "3V3" at 13.166,3.41 h0.5
  text "SWD" at 15.166,3.41 h0.5
  text "CLK" at 17.166,3.41 h0.5
  text "GND" at 19.166,3.41 h0.5
  text "RST" at 21.166,3.41 h0.5
  text "MODE" at 23.416,3.41 h0.5
  text "H" at 14.349,0.478 h0.4
  text "BOOT" at 16.411,0.478 h0.5
  text "L" at 16.894,0.478 h0.4
  text "RX1" at 19.083,0.478 h0.5
  text "TX1" at 21.083,0.478 h0.5
  text "GND" at 23.166,0.478 h0.5